# Altium PCB BuySellDisplay4Rev.PcbDoc (part 2 of 2)
Units mil, origin at the board's own origin, x right, y up, seen from the top; angles counter-clockwise.
Board outline 16511.81 x 6377.95 mil, 2 copper layers (Top Layer, Bottom Layer); 219 components, 209 nets, 584 pads, 70 vias.
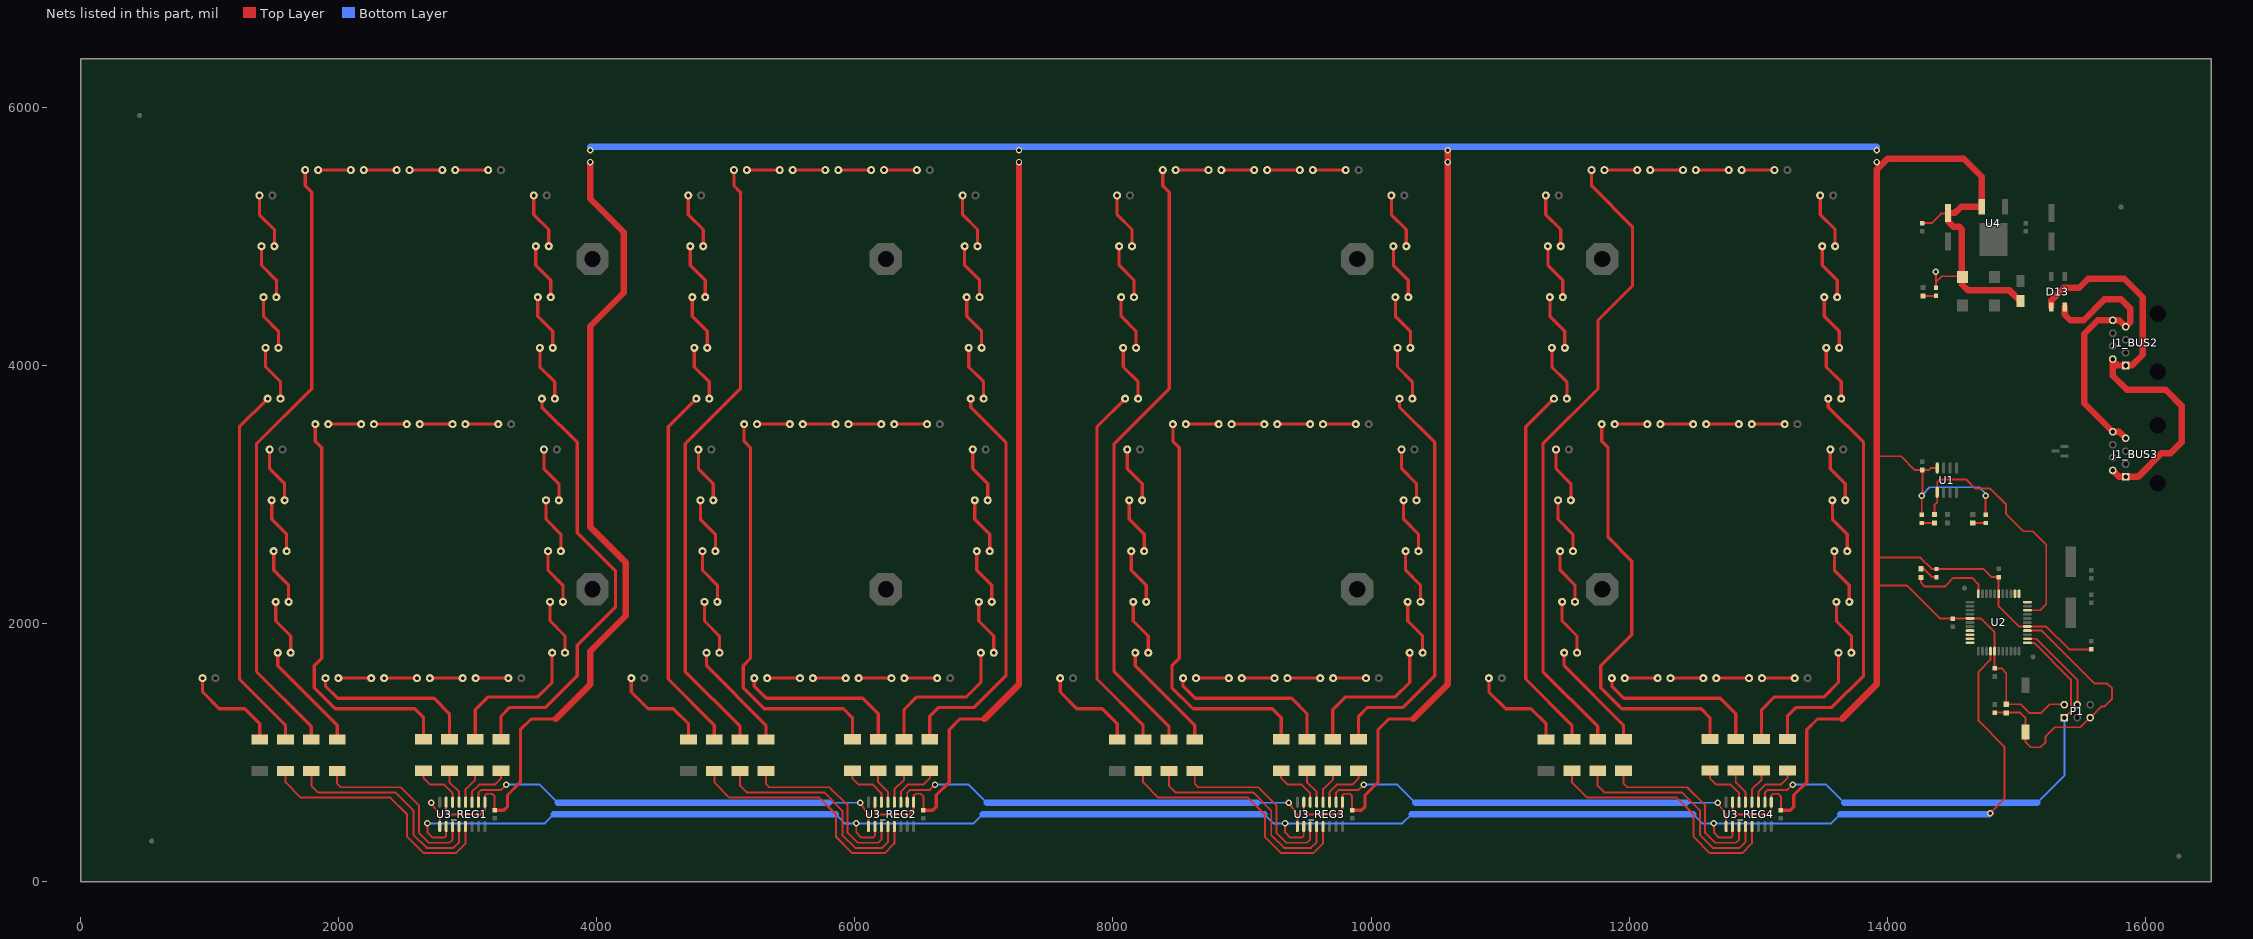
[diagram p2: the nets of this part, all layers, seen from the top]

## Via types
v1: diameter 50, hole 28, Top Layer to Bottom Layer, 68 vias
v2: diameter 50, hole 27.99, Top Layer to Bottom Layer, 2 vias

## Nets (pads, with @x,y where several pads share a name; then routed paths per layer and width w, separated by ;. In a path a pad name is that pad's centre, name@x,y a point inside that pad or via, vN(x,y) a via of type N, cw(c..) or ccw(c..) an arc to the next point about the centre after c; other vN are vias at no path point) (continued)
IND: R5.1 U2.22 | length 620.8
  Top Layer w15: R5.1@14262.45,2357.54 14262.45,2316 14292.45,2286 14445.45,2286 14513.45,2354 14657.45,2354 14706.07,2305.38 U2.22@14706.07,2230.49
INPUT: P1.1 U2.1 U3_REG4.2 | length 3785.5
  Top Layer w15: U3_REG4.2@13051.45,615.49 13051.45,689.43 13073.02,711 13226.45,711 v1(13266.45,751) ; U2.1@15085.99,1850.57 15137.88,1850.57 15422.45,1566 15422.45,1321 P1.1@15372.45,1271
  Bottom Layer w15: v1(13266.45,751) 13526.45,751 13666.45,611 ; 15162.45,611 15372.45,821 P1.1@15372.45,1271
  Bottom Layer w50: 13666.45,611 15162.45,611
MISO: P1.4 U2.2 | length 715.4
  Top Layer w15: U2.2@15085.99,1882.06 15156.38,1882.06 15474.02,1564.43 P1.4@15474.02,1368.64
NetD2_1: D2.1 R2.1 | length 98
  Top Layer w15: D2.1@14269.42,2777.54 R2.1@14367.45,2777.54
NetD3_1: D3.1 R3.1 | length 98
  Top Layer w15: R3.1@14662.45,2777.54 D3.1@14760.48,2777.54
NetD4_1: D4.1 R5.2 | length 146.9
  Top Layer w15: R5.2@14262.45,2424.46 14283.98,2424.46 14348.94,2359.5 D4.1@14382.45,2359.5
NetD6_7SEG1_K: D6_7SEG1.K R6_7SEG1.1 | length 775.5
  Top Layer w25: D6_7SEG1.K@945.46,1576.91 945.46,1469.1 1074.56,1340 1271.32,1340 1388.44,1222.88 R6_7SEG1.1@1388.44,1100.16
NetD6_7SEG2_K: D6_7SEG2.K R6_7SEG2.1 | length 775.5
  Top Layer w25: D6_7SEG2.K@4268.17,1576.91 4268.17,1469.1 4397.26,1340 4594.03,1340 4711.15,1222.88 R6_7SEG2.1@4711.15,1100.16
NetD6_7SEG3_K: D6_7SEG3.K R6_7SEG3.1 | length 775.5
  Top Layer w25: D6_7SEG3.K@7590.88,1576.91 7590.88,1469.1 7719.97,1340 7916.74,1340 8033.86,1222.88 R6_7SEG3.1@8033.86,1100.16
NetD6_7SEG4_K: D6_7SEG4.K R6_7SEG4.1 | length 775.5
  Top Layer w25: D6_7SEG4.K@10913.58,1576.91 10913.58,1469.1 11042.68,1340 11239.45,1340 11356.56,1222.88 R6_7SEG4.1@11356.56,1100.16
NetD7_L1_K: D7_L1.K D8_L1.A | length 254.4
  Top Layer w25: D8_L1.A@3061.21,1576.91 D7_L1.K@3315.6,1576.91
NetD7_L2_K: D7_L2.K D8_L2.A | length 441.6
  Top Layer w25: D7_L2.K@3591,3348.56 3591,3200.32 3706.75,3084.58 D8_L2.A@3706.75,2954.86
NetD7_L3_K: D7_L3.K D8_L3.A | length 441.6
  Top Layer w25: D7_L3.K@1465.15,3348.56 1465.15,3200.32 1580.89,3084.58 D8_L3.A@1580.89,2954.86
NetD7_L4_K: D7_L4.K D8_L4.A | length 254.4
  Top Layer w25: D8_L4.A@2982.41,3545.41 D7_L4.K@3236.86,3545.41
NetD7_L5_K: D7_L5.K D8_L5.A | length 441.6
  Top Layer w25: D7_L5.K@1386.41,5317.06 1386.41,5168.83 1502.15,5053.08 D8_L5.A@1502.15,4923.36
NetD7_L6_K: D7_L6.K D8_L6.A | length 441.6
  Top Layer w25: D7_L6.K@3512.26,5317.06 3512.26,5168.83 3628.01,5053.08 D8_L6.A@3628.01,4923.36
NetD7_L7_K: D7_L7.K D8_L7.A | length 254.4
  Top Layer w25: D8_L7.A@2903.73,5513.91 D7_L7.K@3158.12,5513.91
NetD7_L8_K: D7_L8.K D8_L8.A | length 254.4
  Top Layer w25: D8_L8.A@6383.92,1576.91 D7_L8.K@6638.31,1576.91
NetD7_L9_K: D7_L9.K D8_L9.A | length 441.6
  Top Layer w25: D7_L9.K@6913.71,3348.56 6913.71,3200.32 7029.46,3084.58 D8_L9.A@7029.46,2954.86
NetD7_L10_K: D7_L10.K D8_L10.A | length 441.6
  Top Layer w25: D7_L10.K@4787.85,3348.56 4787.85,3200.32 4903.6,3084.58 D8_L10.A@4903.6,2954.86
NetD7_L11_K: D7_L11.K D8_L11.A | length 254.4
  Top Layer w25: D8_L11.A@6305.11,3545.41 D7_L11.K@6559.57,3545.41
NetD7_L12_K: D7_L12.K D8_L12.A | length 441.6
  Top Layer w25: D7_L12.K@4709.11,5317.06 4709.11,5168.83 4824.86,5053.08 D8_L12.A@4824.86,4923.36
NetD7_L13_K: D7_L13.K D8_L13.A | length 441.6
  Top Layer w25: D7_L13.K@6834.97,5317.06 6834.97,5168.83 6950.72,5053.08 D8_L13.A@6950.72,4923.36
NetD7_L14_K: D7_L14.K D8_L14.A | length 254.4
  Top Layer w25: D8_L14.A@6226.44,5513.91 D7_L14.K@6480.83,5513.91
NetD7_L15_K: D7_L15.K D8_L15.A | length 254.4
  Top Layer w25: D8_L15.A@9706.62,1576.91 D7_L15.K@9961.02,1576.91
NetD7_L16_K: D7_L16.K D8_L16.A | length 441.6
  Top Layer w25: D7_L16.K@10236.42,3348.56 10236.42,3200.32 10352.16,3084.58 D8_L16.A@10352.16,2954.86
NetD7_L17_K: D7_L17.K D8_L17.A | length 441.6
  Top Layer w25: D7_L17.K@8110.56,3348.56 8110.56,3200.32 8226.31,3084.58 D8_L17.A@8226.31,2954.86
NetD7_L18_K: D7_L18.K D8_L18.A | length 254.4
  Top Layer w25: D8_L18.A@9627.82,3545.41 D7_L18.K@9882.28,3545.41
NetD7_L19_K: D7_L19.K D8_L19.A | length 441.6
  Top Layer w25: D7_L19.K@8031.82,5317.06 8031.82,5168.83 8147.57,5053.08 D8_L19.A@8147.57,4923.36
NetD7_L20_K: D7_L20.K D8_L20.A | length 441.6
  Top Layer w25: D7_L20.K@10157.68,5317.06 10157.68,5168.83 10273.42,5053.08 D8_L20.A@10273.42,4923.36
NetD7_L21_K: D7_L21.K D8_L21.A | length 254.4
  Top Layer w25: D8_L21.A@9549.14,5513.91 D7_L21.K@9803.54,5513.91
NetD7_L22_K: D7_L22.K D8_L22.A | length 254.4
  Top Layer w25: D8_L22.A@13029.33,1576.91 D7_L22.K@13283.73,1576.91
NetD7_L23_K: D7_L23.K D8_L23.A | length 441.6
  Top Layer w25: D7_L23.K@13559.12,3348.56 13559.12,3200.32 13674.87,3084.58 D8_L23.A@13674.87,2954.86
NetD7_L24_K: D7_L24.K D8_L24.A | length 441.6
  Top Layer w25: D7_L24.K@11433.27,3348.56 11433.27,3200.32 11549.02,3084.58 D8_L24.A@11549.08,2954.86
NetD7_L25_K: D7_L25.K D8_L25.A | length 254.4
  Top Layer w25: D8_L25.A@12950.59,3545.41 D7_L25.K@13204.99,3545.41
NetD7_L26_K: D7_L26.K D8_L26.A | length 441.6
  Top Layer w25: D7_L26.K@11354.53,5317.06 11354.53,5168.83 11470.28,5053.08 D8_L26.A@11470.28,4923.36
NetD7_L27_K: D7_L27.K D8_L27.A | length 441.6
  Top Layer w25: D7_L27.K@13480.38,5317.06 13480.38,5168.83 13596.13,5053.08 D8_L27.A@13596.13,4923.36
NetD7_L28_K: D7_L28.K D8_L28.A | length 254.4
  Top Layer w25: D8_L28.A@12871.85,5513.91 D7_L28.K@13126.25,5513.91
NetD8_L1_K: D8_L1.K D9_L1.A | length 254.4
  Top Layer w25: D9_L1.A@2706.81,1576.91 D8_L1.K@2961.21,1576.91
NetD8_L2_K: D8_L2.K D9_L2.A | length 441.6
  Top Layer w25: D8_L2.K@3606.75,2954.86 3606.75,2806.62 3722.5,2690.88 D9_L2.A@3722.43,2561.16
NetD8_L3_K: D8_L3.K D9_L3.A | length 441.6
  Top Layer w25: D8_L3.K@1480.89,2954.86 1480.89,2806.62 1596.64,2690.88 D9_L3.A@1596.64,2561.16
NetD8_L4_K: D8_L4.K D9_L4.A | length 254.4
  Top Layer w25: D9_L4.A@2628.07,3545.41 D8_L4.K@2882.41,3545.41
NetD8_L5_K: D8_L5.K D9_L5.A | length 441.6
  Top Layer w25: D8_L5.K@1402.15,4923.36 1402.15,4775.13 1517.9,4659.38 D9_L5.A@1517.9,4529.66
NetD8_L6_K: D8_L6.K D9_L6.A | length 441.6
  Top Layer w25: D8_L6.K@3528.01,4923.36 3528.01,4775.13 3643.76,4659.38 D9_L6.A@3643.76,4529.66
NetD8_L7_K: D8_L7.K D9_L7.A | length 254.4
  Top Layer w25: D9_L7.A@2549.33,5513.91 D8_L7.K@2803.73,5513.91
NetD8_L8_K: D8_L8.K D9_L8.A | length 254.4
  Top Layer w25: D9_L8.A@6029.52,1576.91 D8_L8.K@6283.92,1576.91
NetD8_L9_K: D8_L9.K D9_L9.A | length 441.6
  Top Layer w25: D8_L9.K@6929.46,2954.86 6929.46,2806.62 7045.2,2690.88 D9_L9.A@7045.2,2561.16
NetD8_L10_K: D8_L10.K D9_L10.A | length 441.6
  Top Layer w25: D8_L10.K@4803.6,2954.86 4803.6,2806.62 4919.35,2690.88 D9_L10.A@4919.35,2561.16
NetD8_L11_K: D8_L11.K D9_L11.A | length 254.4
  Top Layer w25: D9_L11.A@5950.78,3545.41 D8_L11.K@6205.11,3545.41
NetD8_L12_K: D8_L12.K D9_L12.A | length 441.6
  Top Layer w25: D8_L12.K@4724.86,4923.36 4724.86,4775.13 4840.61,4659.38 D9_L12.A@4840.61,4529.66
NetD8_L13_K: D8_L13.K D9_L13.A | length 441.6
  Top Layer w25: D8_L13.K@6850.72,4923.36 6850.72,4775.13 6966.46,4659.38 D9_L13.A@6966.4,4529.66
NetD8_L14_K: D8_L14.K D9_L14.A | length 254.4
  Top Layer w25: D9_L14.A@5872.04,5513.91 D8_L14.K@6126.44,5513.91
NetD8_L15_K: D8_L15.K D9_L15.A | length 254.4
  Top Layer w25: D9_L15.A@9352.29,1576.91 D8_L15.K@9606.62,1576.91
NetD8_L16_K: D8_L16.K D9_L16.A | length 441.6
  Top Layer w25: D8_L16.K@10252.16,2954.86 10252.16,2806.62 10367.91,2690.88 D9_L16.A@10367.91,2561.16
NetD8_L17_K: D8_L17.K D9_L17.A | length 441.6
  Top Layer w25: D8_L17.K@8126.31,2954.86 8126.31,2806.62 8242.06,2690.88 D9_L17.A@8242.06,2561.16
NetD8_L18_K: D8_L18.K D9_L18.A | length 254.4
  Top Layer w25: D9_L18.A@9273.49,3545.41 D8_L18.K@9527.82,3545.41
NetD8_L19_K: D8_L19.K D9_L19.A | length 441.6
  Top Layer w25: D8_L19.K@8047.57,4923.36 8047.57,4775.13 8163.32,4659.38 D9_L19.A@8163.32,4529.66
NetD8_L20_K: D8_L20.K D9_L20.A | length 441.6
  Top Layer w25: D8_L20.K@10173.42,4923.36 10173.42,4775.13 10289.17,4659.38 D9_L20.A@10289.11,4529.66
NetD8_L21_K: D8_L21.K D9_L21.A | length 254.4
  Top Layer w25: D9_L21.A@9194.75,5513.91 D8_L21.K@9449.14,5513.91
NetD8_L22_K: D8_L22.K D9_L22.A | length 254.4
  Top Layer w25: D9_L22.A@12674.94,1576.91 D8_L22.K@12929.33,1576.91
NetD8_L23_K: D8_L23.K D9_L23.A | length 441.6
  Top Layer w25: D8_L23.K@13574.87,2954.86 13574.87,2806.62 13690.62,2690.88 D9_L23.A@13690.62,2561.16
NetD8_L24_K: D8_L24.K D9_L24.A | length 441.6
  Top Layer w25: D8_L24.K@11449.08,2954.86 11449.02,2806.62 11564.77,2690.88 D9_L24.A@11564.77,2561.16
NetD8_L25_K: D8_L25.K D9_L25.A | length 254.4
  Top Layer w25: D9_L25.A@12596.26,3545.41 D8_L25.K@12850.59,3545.41
NetD8_L26_K: D8_L26.K D9_L26.A | length 441.6
  Top Layer w25: D8_L26.K@11370.28,4923.36 11370.28,4775.13 11486.03,4659.38 D9_L26.A@11486.03,4529.66
NetD8_L27_K: D8_L27.K D9_L27.A | length 441.6
  Top Layer w25: D8_L27.K@13496.13,4923.36 13496.13,4775.13 13611.88,4659.38 D9_L27.A@13611.82,4529.66
NetD8_L28_K: D8_L28.K D9_L28.A | length 254.4
  Top Layer w25: D9_L28.A@12517.46,5513.91 D8_L28.K@12771.85,5513.91
NetD9_L1_K: D9_L1.K D10_L1.A | length 254.4
  Top Layer w25: D10_L1.A@2352.55,1576.91 D9_L1.K@2606.94,1576.91
NetD9_L2_K: D9_L2.K D10_L2.A | length 441.6
  Top Layer w25: D9_L2.K@3622.43,2561.16 3622.43,2412.92 3738.18,2297.18 D10_L2.A@3738.18,2167.46
NetD9_L3_K: D9_L3.K D10_L3.A | length 441.6
  Top Layer w25: D9_L3.K@1496.58,2561.16 1496.58,2412.92 1612.33,2297.18 D10_L3.A@1612.39,2167.46
NetD9_L4_K: D9_L4.K D10_L4.A | length 254.4
  Top Layer w25: D10_L4.A@2273.81,3545.41 D9_L4.K@2528.2,3545.41
NetD9_L5_K: D9_L5.K D10_L5.A | length 441.6
  Top Layer w25: D9_L5.K@1417.84,4529.66 1417.84,4381.43 1533.59,4265.68 D10_L5.A@1533.59,4135.96
NetD9_L6_K: D9_L6.K D10_L6.A | length 441.6
  Top Layer w25: D9_L6.K@3543.69,4529.66 3543.69,4381.43 3659.44,4265.68 D10_L6.A@3659.44,4135.96
NetD9_L7_K: D9_L7.K D10_L7.A | length 254.4
  Top Layer w25: D10_L7.A@2195,5513.91 D9_L7.K@2449.46,5513.91
NetD9_L8_K: D9_L8.K D10_L8.A | length 254.4
  Top Layer w25: D10_L8.A@5675.25,1576.91 D9_L8.K@5929.65,1576.91
NetD9_L9_K: D9_L9.K D10_L9.A | length 441.6
  Top Layer w25: D9_L9.K@6945.14,2561.16 6945.14,2412.92 7060.89,2297.18 D10_L9.A@7060.89,2167.46
NetD9_L10_K: D9_L10.K D10_L10.A | length 441.6
  Top Layer w25: D9_L10.K@4819.29,2561.16 4819.29,2412.92 4935.04,2297.18 D10_L10.A@4935.1,2167.46
NetD9_L11_K: D9_L11.K D10_L11.A | length 254.4
  Top Layer w25: D10_L11.A@5596.51,3545.41 D9_L11.K@5850.91,3545.41
NetD9_L12_K: D9_L12.K D10_L12.A | length 441.6
  Top Layer w25: D9_L12.K@4740.55,4529.66 4740.55,4381.43 4856.3,4265.68 D10_L12.A@4856.3,4135.96
NetD9_L13_K: D9_L13.K D10_L13.A | length 441.6
  Top Layer w25: D9_L13.K@6866.4,4529.66 6866.4,4381.43 6982.15,4265.68 D10_L13.A@6982.15,4135.96
NetD9_L14_K: D9_L14.K D10_L14.A | length 254.4
  Top Layer w25: D10_L14.A@5517.71,5513.91 D9_L14.K@5772.17,5513.91
NetD9_L15_K: D9_L15.K D10_L15.A | length 254.4
  Top Layer w25: D10_L15.A@8997.96,1576.91 D9_L15.K@9252.36,1576.91
NetD9_L16_K: D9_L16.K D10_L16.A | length 441.6
  Top Layer w25: D9_L16.K@10267.85,2561.16 10267.85,2412.92 10383.6,2297.18 D10_L16.A@10383.66,2167.46
NetD9_L17_K: D9_L17.K D10_L17.A | length 441.6
  Top Layer w25: D9_L17.K@8142,2561.16 8142,2412.92 8257.74,2297.18 D10_L17.A@8257.74,2167.46
NetD9_L18_K: D9_L18.K D10_L18.A | length 254.4
  Top Layer w25: D10_L18.A@8919.22,3545.41 D9_L18.K@9173.62,3545.41
NetD9_L19_K: D9_L19.K D10_L19.A | length 441.6
  Top Layer w25: D9_L19.K@8063.26,4529.66 8063.26,4381.43 8179,4265.68 D10_L19.A@8179.07,4135.96
NetD9_L20_K: D9_L20.K D10_L20.A | length 441.6
  Top Layer w25: D9_L20.K@10189.11,4529.66 10189.11,4381.43 10304.86,4265.68 D10_L20.A@10304.86,4135.96
NetD9_L21_K: D9_L21.K D10_L21.A | length 254.4
  Top Layer w25: D10_L21.A@8840.42,5513.91 D9_L21.K@9094.88,5513.91
NetD9_L22_K: D9_L22.K D10_L22.A | length 254.4
  Top Layer w25: D10_L22.A@12320.67,1576.91 D9_L22.K@12575,1576.91
NetD9_L23_K: D9_L23.K D10_L23.A | length 441.6
  Top Layer w25: D9_L23.K@13590.56,2561.16 13590.56,2412.92 13706.31,2297.18 D10_L23.A@13706.37,2167.46
NetD9_L24_K: D9_L24.K D10_L24.A | length 441.6
  Top Layer w25: D9_L24.K@11464.77,2561.16 11464.7,2412.92 11580.45,2297.18 D10_L24.A@11580.45,2167.46
NetD9_L25_K: D9_L25.K D10_L25.A | length 254.4
  Top Layer w25: D10_L25.A@12241.93,3545.41 D9_L25.K@12496.32,3545.41
NetD9_L26_K: D9_L26.K D10_L26.A | length 441.6
  Top Layer w25: D9_L26.K@11385.96,4529.66 11385.96,4381.43 11501.71,4265.68 D10_L26.A@11501.71,4135.96
NetD9_L27_K: D9_L27.K D10_L27.A | length 441.6
  Top Layer w25: D9_L27.K@13511.82,4529.66 13511.82,4381.43 13627.57,4265.68 D10_L27.A@13627.57,4135.96
NetD9_L28_K: D9_L28.K D10_L28.A | length 254.4
  Top Layer w25: D10_L28.A@12163.19,5513.91 D9_L28.K@12417.58,5513.91
NetD10_L1_K: D10_L1.K D11_L1.A | length 254.4
  Top Layer w25: D11_L1.A@1998.15,1576.91 D10_L1.K@2252.55,1576.91
NetD10_L2_K: D10_L2.K D11_L2.A | length 441.6
  Top Layer w25: D10_L2.K@3638.24,2167.46 3638.24,2019.22 3753.99,1903.47 D11_L2.A@3753.99,1773.76
NetD10_L3_K: D10_L3.K D11_L3.A | length 441.6
  Top Layer w25: D10_L3.K@1512.39,2167.46 1512.39,2019.22 1628.14,1903.47 D11_L3.A@1628.14,1773.76
NetD10_L4_K: D10_L4.K D11_L4.A | length 254.4
  Top Layer w25: D11_L4.A@1919.41,3545.41 D10_L4.K@2173.81,3545.41
NetD10_L5_K: D10_L5.K D11_L5.A | length 441.6
  Top Layer w25: D10_L5.K@1433.65,4135.96 1433.65,3987.73 1549.4,3871.98 D11_L5.A@1549.4,3742.26
NetD10_L6_K: D10_L6.K D11_L6.A | length 441.6
  Top Layer w25: D10_L6.K@3559.5,4135.96 3559.5,3987.73 3675.25,3871.98 D11_L6.A@3675.25,3742.26
NetD10_L7_K: D10_L7.K D11_L7.A | length 254.4
  Top Layer w25: D11_L7.A@1840.67,5513.91 D10_L7.K@2095,5513.91
NetD10_L8_K: D10_L8.K D11_L8.A | length 254.4
  Top Layer w25: D11_L8.A@5320.86,1576.91 D10_L8.K@5575.25,1576.91
NetD10_L9_K: D10_L9.K D11_L9.A | length 441.6
  Top Layer w25: D10_L9.K@6960.95,2167.46 6960.95,2019.22 7076.7,1903.47 D11_L9.A@7076.7,1773.76
NetD10_L10_K: D10_L10.K D11_L10.A | length 441.6
  Top Layer w25: D10_L10.K@4835.1,2167.46 4835.1,2019.22 4950.85,1903.47 D11_L10.A@4950.85,1773.76
NetD10_L11_K: D10_L11.K D11_L11.A | length 254.4
  Top Layer w25: D11_L11.A@5242.12,3545.41 D10_L11.K@5496.51,3545.41
NetD10_L12_K: D10_L12.K D11_L12.A | length 441.6
  Top Layer w25: D10_L12.K@4756.36,4135.96 4756.36,3987.73 4872.11,3871.98 D11_L12.A@4872.11,3742.26
NetD10_L13_K: D10_L13.K D11_L13.A | length 441.6
  Top Layer w25: D10_L13.K@6882.21,4135.96 6882.21,3987.73 6997.96,3871.98 D11_L13.A@6997.96,3742.26
NetD10_L14_K: D10_L14.K D11_L14.A | length 254.4
  Top Layer w25: D11_L14.A@5163.38,5513.91 D10_L14.K@5417.71,5513.91
NetD10_L15_K: D10_L15.K D11_L15.A | length 254.4
  Top Layer w25: D11_L15.A@8643.57,1576.91 D10_L15.K@8897.96,1576.91
NetD10_L16_K: D10_L16.K D11_L16.A | length 441.6
  Top Layer w25: D10_L16.K@10283.66,2167.46 10283.66,2019.22 10399.41,1903.47 D11_L16.A@10399.41,1773.76
NetD10_L17_K: D10_L17.K D11_L17.A | length 441.6
  Top Layer w25: D10_L17.K@8157.81,2167.46 8157.81,2019.22 8273.55,1903.47 D11_L17.A@8273.55,1773.76
NetD10_L18_K: D10_L18.K D11_L18.A | length 254.4
  Top Layer w25: D11_L18.A@8564.83,3545.41 D10_L18.K@8819.22,3545.41
NetD10_L19_K: D10_L19.K D11_L19.A | length 441.6
  Top Layer w25: D10_L19.K@8079.07,4135.96 8079.07,3987.73 8194.81,3871.98 D11_L19.A@8194.81,3742.26
NetD10_L20_K: D10_L20.K D11_L20.A | length 441.6
  Top Layer w25: D10_L20.K@10204.92,4135.96 10204.92,3987.73 10320.67,3871.98 D11_L20.A@10320.61,3742.26
NetD10_L21_K: D10_L21.K D11_L21.A | length 254.4
  Top Layer w25: D11_L21.A@8486.09,5513.91 D10_L21.K@8740.42,5513.91
NetD10_L22_K: D10_L22.K D11_L22.A | length 254.4
  Top Layer w25: D11_L22.A@11966.28,1576.91 D10_L22.K@12220.67,1576.91
NetD10_L23_K: D10_L23.K D11_L23.A | length 441.6
  Top Layer w25: D10_L23.K@13606.37,2167.46 13606.37,2019.22 13722.12,1903.47 D11_L23.A@13722.12,1773.76
NetD10_L24_K: D10_L24.K D11_L24.A | length 441.6
  Top Layer w25: D10_L24.K@11480.51,2167.46 11480.51,2019.22 11596.26,1903.47 D11_L24.A@11596.26,1773.76
NetD10_L25_K: D10_L25.K D11_L25.A | length 254.4
  Top Layer w25: D11_L25.A@11887.54,3545.41 D10_L25.K@12141.93,3545.41
NetD10_L26_K: D10_L26.K D11_L26.A | length 441.6
  Top Layer w25: D10_L26.K@11401.77,4135.96 11401.77,3987.73 11517.52,3871.98 D11_L26.A@11517.52,3742.26
NetD10_L27_K: D10_L27.K D11_L27.A | length 441.6
  Top Layer w25: D10_L27.K@13527.63,4135.96 13527.63,3987.73 13643.38,3871.98 D11_L27.A@13643.31,3742.26
NetD10_L28_K: D10_L28.K D11_L28.A | length 254.4
  Top Layer w25: D11_L28.A@11808.8,5513.91 D10_L28.K@12063.19,5513.91
NetD11_L1_K: D11_L1.K R7_L1.1 | length 1309.4
  Top Layer w25: D11_L1.K@1898.15,1576.91 1898.15,1513.69 1991.85,1420 2739.32,1420 2858.32,1301 R7_L1.1@2858.32,1103.05
NetD11_L2_K: D11_L2.K R7_L2.1 | length 1142.4
  Top Layer w25: R7_L2.1@3058.32,1103.05 3058.32,1331 3158.32,1431 3542.32,1431 3653.99,1542.67 D11_L2.K@3653.99,1773.76
NetD11_L3_K: D11_L3.K R7_L3.1 | length 861.3
  Top Layer w25: D11_L3.K@1528.14,1773.76 1528.14,1673.19 1988.44,1212.88 R7_L3.1@1988.44,1103.12
NetD11_L4_K: D11_L4.K R7_L4.1 | length 3197
  Top Layer w25: D11_L4.K@1819.41,3545.41 1819.41,3412.43 1868.85,3363 1868.85,1731 1811.85,1674 1811.85,1503 1974.85,1340 2589.32,1340 2658.32,1271 R7_L4.1@2658.32,1103.05
NetD11_L5_K: D11_L5.K R7_L5.1 | length 2877.4
  Top Layer w25: D11_L5.K@1449.4,3742.26 1231.32,3524.19 1231.32,1570 1588.44,1212.88 R7_L5.1@1588.44,1103.12
NetD11_L6_K: D11_L6.K R7_L6.1 | length 3404.7
  Top Layer w25: R7_L6.1@3258.32,1103.05 3258.32,1281 3327.32,1350 3603.32,1350 3848.32,1595 3848.32,1832.58 4145.67,2129.92 4145.67,2405.51 3848.32,2702.86 3848.32,3403 3575.19,3676.13 D11_L6.K@3575.19,3742.26
NetD11_L7_K: D11_L7.K R7_L7.1 | length 4784.6
  Top Layer w25: D11_L7.K@1740.67,5513.91 1740.67,5391.17 1790.85,5341 1790.85,3819.52 1363.56,3392.23 1363.56,1627.77 1788.44,1202.88 R7_L7.1@1788.44,1103.12
NetD11_L8_K: D11_L8.K R7_L8.1 | length 1309.4
  Top Layer w25: D11_L8.K@5220.86,1576.91 5220.86,1513.69 5314.55,1420 6062.03,1420 6181.03,1301 R7_L8.1@6181.03,1103.05
NetD11_L9_K: D11_L9.K R7_L9.1 | length 1142.4
  Top Layer w25: R7_L9.1@6381.03,1103.05 6381.03,1331 6481.03,1431 6865.03,1431 6976.7,1542.67 D11_L9.K@6976.7,1773.76
NetD11_L10_K: D11_L10.K R7_L10.1 | length 861.3
  Top Layer w25: D11_L10.K@4850.85,1773.76 4850.85,1673.19 5311.15,1212.88 R7_L10.1@5311.15,1103.12
NetD11_L11_K: D11_L11.K R7_L11.1 | length 3197
  Top Layer w25: D11_L11.K@5142.12,3545.41 5142.12,3412.43 5191.55,3363 5191.55,1731 5134.55,1674 5134.55,1503 5297.55,1340 5912.03,1340 5981.03,1271 R7_L11.1@5981.03,1103.05
NetD11_L12_K: D11_L12.K R7_L12.1 | length 2877.4
  Top Layer w25: D11_L12.K@4772.11,3742.26 4554.03,3524.19 4554.03,1570 4911.15,1212.88 R7_L12.1@4911.15,1103.12
NetD11_L13_K: D11_L13.K R7_L13.1 | length 3158.4
  Top Layer w25: R7_L13.1@6581.03,1103.05 6581.03,1281 6650.03,1350 6926.03,1350 7171.03,1595 7171.03,3403 6897.9,3676.13 D11_L13.K@6897.9,3742.26
NetD11_L14_K: D11_L14.K R7_L14.1 | length 4784.6
  Top Layer w25: D11_L14.K@5063.38,5513.91 5063.38,5391.17 5113.55,5341 5113.55,3819.52 4686.26,3392.23 4686.26,1627.77 5111.15,1202.88 R7_L14.1@5111.15,1103.12
NetD11_L15_K: D11_L15.K R7_L15.1 | length 1309.4
  Top Layer w25: D11_L15.K@8543.57,1576.91 8543.57,1513.69 8637.26,1420 9384.74,1420 9503.74,1301 R7_L15.1@9503.74,1103.05
NetD11_L16_K: D11_L16.K R7_L16.1 | length 1142.4
  Top Layer w25: R7_L16.1@9703.74,1103.05 9703.74,1331 9803.74,1431 10187.74,1431 10299.41,1542.67 D11_L16.K@10299.41,1773.76
NetD11_L17_K: D11_L17.K R7_L17.1 | length 861.3
  Top Layer w25: D11_L17.K@8173.55,1773.76 8173.55,1673.19 8633.86,1212.88 R7_L17.1@8633.86,1103.12
NetD11_L18_K: D11_L18.K R7_L18.1 | length 3197
  Top Layer w25: D11_L18.K@8464.83,3545.41 8464.83,3412.43 8514.26,3363 8514.26,1731 8457.26,1674 8457.26,1503 8620.26,1340 9234.74,1340 9303.74,1271 R7_L18.1@9303.74,1103.05
NetD11_L19_K: D11_L19.K R7_L19.1 | length 2877.4
  Top Layer w25: D11_L19.K@8094.81,3742.26 7876.74,3524.19 7876.74,1570 8233.86,1212.88 R7_L19.1@8233.86,1103.12
NetD11_L20_K: D11_L20.K R7_L20.1 | length 3158.4
  Top Layer w25: R7_L20.1@9903.74,1103.05 9903.74,1281 9972.74,1350 10248.74,1350 10493.74,1595 10493.74,3403 10220.61,3676.13 D11_L20.K@10220.61,3742.26
NetD11_L21_K: D11_L21.K R7_L21.1 | length 4784.6
  Top Layer w25: D11_L21.K@8386.09,5513.91 8386.09,5391.17 8436.26,5341 8436.26,3819.52 8008.97,3392.23 8008.97,1627.77 8433.86,1202.88 R7_L21.1@8433.86,1103.12
NetD11_L22_K: D11_L22.K R7_L22.1 | length 1309.4
  Top Layer w25: D11_L22.K@11866.28,1576.91 11866.28,1513.69 11959.97,1420 12707.45,1420 12826.45,1301 R7_L22.1@12826.45,1103.05
NetD11_L23_K: D11_L23.K R7_L23.1 | length 1142.4
  Top Layer w25: R7_L23.1@13026.45,1103.05 13026.45,1331 13126.45,1431 13510.45,1431 13622.12,1542.67 D11_L23.K@13622.12,1773.76
NetD11_L24_K: D11_L24.K R7_L24.1 | length 861.3
  Top Layer w25: D11_L24.K@11496.26,1773.76 11496.26,1673.19 11956.56,1212.88 R7_L24.1@11956.56,1103.12
NetD11_L25_K: D11_L25.K R7_L25.1 | length 3349
  Top Layer w25: D11_L25.K@11787.54,3545.41 11787.54,3412.43 11836.97,3363 11836.97,2667.36 12020.47,2483.86 12020.47,1914.5 11779.97,1674 11779.97,1503 11942.97,1340 12557.45,1340 12626.45,1271 R7_L25.1@12626.45,1103.05
NetD11_L26_K: D11_L26.K R7_L26.1 | length 2877.4
  Top Layer w25: D11_L26.K@11417.52,3742.26 11199.45,3524.19 11199.45,1570 11556.56,1212.88 R7_L26.1@11556.56,1103.12
NetD11_L27_K: D11_L27.K R7_L27.1 | length 3158.4
  Top Layer w25: R7_L27.1@13226.45,1103.05 13226.45,1281 13295.45,1350 13571.45,1350 13816.45,1595 13816.45,3403 13543.31,3676.13 D11_L27.K@13543.31,3742.26
NetD11_L28_K: D11_L28.K R7_L28.1 | length 5005.4
  Top Layer w25: D11_L28.K@11708.8,5513.91 11708.8,5391.17 12025.59,5074.38 12025.59,4615.35 11758.97,4348.73 11758.97,3819.52 11331.68,3392.23 11331.68,1627.77 11756.56,1202.88 R7_L28.1@11756.56,1103.12
NetD14_1: D14.1 R8.1 | length 98
  Top Layer w15: R8.1@14279.42,4539.5 D14.1@14377.45,4539.5
NetU3_REG1_2: U3_REG1.2 U3_REG2.9 | length 3309.7
  Top Layer w15: U3_REG1.2@3083.32,615.49 3083.32,689.43 3104.89,711 3258.32,711 v1(3298.32,751) ; v1(6041.03,611) 6106.03,516 U3_REG2.9@6106.03,426.51
  Bottom Layer w15: v1(3298.32,751) 3558.32,751 3698.32,611 ; 5807.03,611 v1(6041.03,611)
  Bottom Layer w50: 3698.32,611 5797.03,611
NetU3_REG2_2: U3_REG2.2 U3_REG3.9 | length 3309.7
  Top Layer w15: U3_REG2.2@6406.03,615.49 6406.03,689.43 6427.6,711 6581.03,711 v1(6621.03,751) ; v1(9363.74,611) 9428.74,516 U3_REG3.9@9428.74,426.51
  Bottom Layer w15: v1(6621.03,751) 6881.03,751 7021.03,611 ; 9129.74,611 v1(9363.74,611)
  Bottom Layer w50: 7021.03,611 9119.74,611
NetU3_REG3_2: U3_REG3.2 U3_REG4.9 | length 3309.7
  Top Layer w15: U3_REG3.2@9728.74,615.49 9728.74,689.43 9750.31,711 9903.74,711 v1(9943.74,751) ; v1(12686.45,611) 12751.45,516 U3_REG4.9@12751.45,426.51
  Bottom Layer w15: v1(9943.74,751) 10203.74,751 10343.74,611 ; 12452.45,611 v1(12686.45,611)
  Bottom Layer w50: 10343.74,611 12442.45,611
OUTPUT: U3_REG1.9 | length 204.6
  Top Layer w15: v1(2718.32,611) 2783.32,516 U3_REG1.9@2783.32,426.51
PIN_A: U2.30
PIN_B: U2.31
PIN_C: U2.32
PIN_D: U2.33
POWER_V+: D13.1 J1_BUS2.1 J1_BUS2.2 J1_BUS3.1 J1_BUS3.2 | length 3324.8
  Top Layer w50: D13.1@15269.89,4452.89 15269.89,4503.44 15367.45,4601 15487.45,4601 15557.45,4671 15837.45,4671 15980,4528.45 15980,4083.55 15895.83,3999.39 15784.06,3999.39 J1_BUS2.2@15747.49,4035.96 ; J1_BUS3.2@15747.45,3186 15797.45,3136 15942.45,3136 16127.45,3321 16197.45,3321 16282.45,3406 16282.45,3686 16157.45,3811 15857.45,3811 15747.49,3920.96 J1_BUS2.2@15747.49,4049.39
POWER_V-: D13.2 J1_BUS2.7 J1_BUS2.8 J1_BUS3.7 J1_BUS3.8 | length 2192.5
  Top Layer w50: D13.2@15375.01,4452.89 15375.01,4393.44 15417.45,4351 15522.45,4351 15682.45,4511 15812.45,4511 15882.45,4441 15882.45,4334.35 J1_BUS2.7@15847.49,4299.39 15797.49,4349.39 15630.83,4349.39 15527.45,4246 15527.45,3706.04 J1_BUS3.8@15747.45,3486 15797.45,3486 J1_BUS3.7@15844.95,3438.5 ; J1_BUS2.8@15747.49,4349.39 J1_BUS2.8@15750.87,4346
RCK: U2.37 U3_REG1.10 U3_REG2.10 U3_REG3.10 U3_REG4.10 | length 14970.4
  Top Layer w15: v1(2688.32,451) 2688.32,381 2728.32,341 2818.32,341 2833.32,356 U3_REG1.10@2833.32,426.51 ; v1(6011.03,451) 6011.03,381 6051.03,341 6141.03,341 6156.03,356 U3_REG2.10@6156.03,426.51 ; v1(9333.74,451) 9333.74,381 9373.74,341 9463.74,341 9478.74,356 U3_REG3.10@9478.74,426.51 ; v1(12656.45,451) 12656.45,381 12696.45,341 12786.45,341 12801.45,356 U3_REG4.10@12801.45,426.51 ; v1(14797.45,531) 14907.45,641 14907.45,1046 14707.45,1246 14707.45,1626 14800.16,1718.71 U2.37@14800.16,1785.21
  Bottom Layer w15: v1(2688.32,451) 3598.32,451 3668.32,521 ; 5851.03,521 5921.03,451 6921.03,451 6991.03,521 ; 9173.74,521 9243.74,451 10243.74,451 10313.74,521 ; 12496.45,521 12566.45,451 13566.45,451 13636.45,521
  Bottom Layer w50: 3668.32,521 5851.03,521 ; 6991.03,521 9173.74,521 ; 10313.74,521 12496.45,521 ; 13636.45,521 14787.45,521 v1(14797.45,531)
RO: R2.2 U1.1 U2.9 | length 1992.7
  Top Layer w15: R2.2@14367.45,2844.46 14367.45,2921 14387.45,2941 14387.45,3096 14407.45,3116 14612.45,3116 14682.45,3046 14797.45,3046 14921.2,2922.25 14921.2,2847.25 15053.7,2714.75 15128.7,2714.75 15232.45,2611 15232.45,2151 15183.98,2102.54 U2.9@15085.99,2102.54
RST: C2.1 P1.5 R4.1 S1.1 U2.4 | length 2240.6
  Top Layer w15: C2.1@14832.45,1309.5 15028.95,1309.5 15072.45,1266 S1.1@15072.45,1160.29 ; S1.1@15072.45,1166 15072.45,1081 15112.45,1041 15187.45,1041 15227.45,1081 15227.45,1126 15297.45,1196 15497.45,1196 15657.45,1356 15682.45,1356 15742.45,1416 15742.45,1498 15706.45,1534 15609.45,1534 15198.39,1945.06 U2.4@15085.99,1945.06
SEGA_7SEG1: R7_L7.2 U3_REG1.12 | length 1708.4
  Top Layer w15: R7_L7.2@1788.44,856.07 1788.44,741.24 1838.68,691 2440.32,691 2581.32,550 2581.32,361.12 2681.45,261 2888.32,261 2933.32,306 U3_REG1.12@2933.32,426.51
SEGA_7SEG2: R7_L14.2 U3_REG2.12 | length 1708.4
  Top Layer w15: R7_L14.2@5111.15,856.07 5111.15,741.24 5161.39,691 5763.03,691 5904.03,550 5904.03,361.12 6004.16,261 6211.03,261 6256.03,306 U3_REG2.12@6256.03,426.51
SEGA_7SEG3: R7_L21.2 U3_REG3.12 | length 1708.4
  Top Layer w15: R7_L21.2@8433.86,856.07 8433.86,741.24 8484.1,691 9085.74,691 9226.74,550 9226.74,361.12 9326.87,261 9533.74,261 9578.74,306 U3_REG3.12@9578.74,426.51
SEGA_7SEG4: R7_L28.2 U3_REG4.12 | length 1708.4
  Top Layer w15: R7_L28.2@11756.56,856.07 11756.56,741.24 11806.81,691 12408.45,691 12549.45,550 12549.45,361.12 12649.57,261 12856.45,261 12901.45,306 U3_REG4.12@12901.45,426.51
SEGB_7SEG1: R7_L5.2 U3_REG1.13 | length 1971.8
  Top Layer w15: R7_L5.2@1588.44,856.07 1588.44,768.12 1705.56,651 2400.32,651 2531.32,520 2531.32,348 2658.32,221 2908.32,221 2983.32,296 U3_REG1.13@2983.32,426.51
SEGB_7SEG2: R7_L12.2 U3_REG2.13 | length 1971.8
  Top Layer w15: R7_L12.2@4911.15,856.07 4911.15,768.12 5028.26,651 5723.03,651 5854.03,520 5854.03,348 5981.03,221 6231.03,221 6306.03,296 U3_REG2.13@6306.03,426.51
SEGB_7SEG3: R7_L19.2 U3_REG3.13 | length 1971.8
  Top Layer w15: R7_L19.2@8233.86,856.07 8233.86,768.12 8350.97,651 9045.74,651 9176.74,520 9176.74,348 9303.74,221 9553.74,221 9628.74,296 U3_REG3.13@9628.74,426.51
SEGB_7SEG4: R7_L26.2 U3_REG4.13 | length 1971.8
  Top Layer w15: R7_L26.2@11556.56,856.07 11556.56,768.12 11673.68,651 12368.45,651 12499.45,520 12499.45,348 12626.45,221 12876.45,221 12951.45,296 U3_REG4.13@12951.45,426.51
SEGC_7SEG1: R7_L6.2 U3_REG1.3 | length 407
  Top Layer w15: U3_REG1.3@3033.32,615.49 3033.32,696 3088.32,751 3208.32,751 3258.32,801 R7_L6.2@3258.32,858.95
SEGC_7SEG2: R7_L13.2 U3_REG2.3 | length 407
  Top Layer w15: U3_REG2.3@6356.03,615.49 6356.03,696 6411.03,751 6531.03,751 6581.03,801 R7_L13.2@6581.03,858.95
SEGC_7SEG3: R7_L20.2 U3_REG3.3 | length 407
  Top Layer w15: U3_REG3.3@9678.74,615.49 9678.74,696 9733.74,751 9853.74,751 9903.74,801 R7_L20.2@9903.74,858.95
SEGC_7SEG4: R7_L27.2 U3_REG4.3 | length 407
  Top Layer w15: U3_REG4.3@13001.45,615.49 13001.45,696 13056.45,751 13176.45,751 13226.45,801 R7_L27.2@13226.45,858.95
SEGD_7SEG1: R7_L4.2 U3_REG1.6 | length 401.1
  Top Layer w15: R7_L4.2@2658.32,858.95 2658.32,801 2708.32,751 2818.32,751 2883.32,686 U3_REG1.6@2883.32,615.49
SEGD_7SEG2: R7_L11.2 U3_REG2.6 | length 401.1
  Top Layer w15: R7_L11.2@5981.03,858.95 5981.03,801 6031.03,751 6141.03,751 6206.03,686 U3_REG2.6@6206.03,615.49
SEGD_7SEG3: R7_L18.2 U3_REG3.6 | length 401.1
  Top Layer w15: R7_L18.2@9303.74,858.95 9303.74,801 9353.74,751 9463.74,751 9528.74,686 U3_REG3.6@9528.74,615.49
SEGD_7SEG4: R7_L25.2 U3_REG4.6 | length 401.1
  Top Layer w15: R7_L25.2@12626.45,858.95 12626.45,801 12676.45,751 12786.45,751 12851.45,686 U3_REG4.6@12851.45,615.49
SEGE_7SEG1: R7_L3.2 U3_REG1.11 | length 1417.2
  Top Layer w15: R7_L3.2@1988.44,856.07 1988.44,758.12 2015.56,731 2480.32,731 2621.32,590 2621.32,378 2698.32,301 2858.32,301 2883.32,326 U3_REG1.11@2883.32,426.51
SEGE_7SEG2: R7_L10.2 U3_REG2.11 | length 1417.2
  Top Layer w15: R7_L10.2@5311.15,856.07 5311.15,758.12 5338.26,731 5803.03,731 5944.03,590 5944.03,378 6021.03,301 6181.03,301 6206.03,326 U3_REG2.11@6206.03,426.51
SEGE_7SEG3: R7_L17.2 U3_REG3.11 | length 1417.2
  Top Layer w15: R7_L17.2@8633.86,856.07 8633.86,758.12 8660.97,731 9125.74,731 9266.74,590 9266.74,378 9343.74,301 9503.74,301 9528.74,326 U3_REG3.11@9528.74,426.51
SEGE_7SEG4: R7_L24.2 U3_REG4.11 | length 1417.2
  Top Layer w15: R7_L24.2@11956.56,856.07 11956.56,758.12 11983.68,731 12448.45,731 12589.45,590 12589.45,378 12666.45,301 12826.45,301 12851.45,326 U3_REG4.11@12851.45,426.51
SEGF_7SEG1: R7_L2.2 U3_REG1.4 | length 274.5
  Top Layer w15: U3_REG1.4@2983.32,615.49 2983.32,716 3058.32,791 R7_L2.2@3058.32,858.95
SEGF_7SEG2: R7_L9.2 U3_REG2.4 | length 274.5
  Top Layer w15: U3_REG2.4@6306.03,615.49 6306.03,716 6381.03,791 R7_L9.2@6381.03,858.95
SEGF_7SEG3: R7_L16.2 U3_REG3.4 | length 274.5
  Top Layer w15: U3_REG3.4@9628.74,615.49 9628.74,716 9703.74,791 R7_L16.2@9703.74,858.95
SEGF_7SEG4: R7_L23.2 U3_REG4.4 | length 274.5
  Top Layer w15: U3_REG4.4@12951.45,615.49 12951.45,716 13026.45,791 R7_L23.2@13026.45,858.95
SEGG_7SEG1: R7_L1.2 U3_REG1.5 | length 274.5
  Top Layer w15: R7_L1.2@2858.32,858.95 2858.32,771 2933.32,696 U3_REG1.5@2933.32,615.49
SEGG_7SEG2: R7_L8.2 U3_REG2.5 | length 274.5
  Top Layer w15: R7_L8.2@6181.03,858.95 6181.03,771 6256.03,696 U3_REG2.5@6256.03,615.49
SEGG_7SEG3: R7_L15.2 U3_REG3.5 | length 274.5
  Top Layer w15: R7_L15.2@9503.74,858.96 9503.74,771 9578.74,696 U3_REG3.5@9578.74,615.49
SEGG_7SEG4: R7_L22.2 U3_REG4.5 | length 274.5
  Top Layer w15: R7_L22.2@12826.45,858.95 12826.45,771 12901.45,696 U3_REG4.5@12901.45,615.49
TCP_RESET: U2.13
USART1_RX: U2.11
USART1_TX: U2.12
VCC: C1.1 C4.1 C5.1 C6.1 C7.1 C9_REG1.1 C9_REG2.1 C9_REG3.1 C9_REG4.1 C11.1 C13.1 D2.2 D3.2 D4.2 D12.2 D14.2 D16.1 P1.2 R4.2 U1.8 U2.5 U2.17 U2.27 U2.38 U3_REG1.1 U3_REG1.7 U3_REG2.1 U3_REG2.7 U3_REG3.1 U3_REG3.7 U3_REG4.1 U3_REG4.7 U4.3 | length 44206.1
  Top Layer w15: U3_REG1.7@2833.32,615.49 2833.32,546 2858.32,521 3098.32,521 3133.32,556 3133.32,666 3148.32,681 3188.32,681 3208.32,661 C9_REG1.1@3208.32,552.5 ; U3_REG2.7@6156.03,615.49 6156.03,546 6181.03,521 6421.03,521 6456.03,556 6456.03,666 6471.03,681 6511.03,681 6531.03,661 C9_REG2.1@6531.03,552.5 ; U3_REG3.7@9478.74,615.49 9478.74,546 9503.74,521 9743.74,521 9778.74,556 9778.74,666 9793.74,681 9833.74,681 9853.74,661 C9_REG3.1@9853.74,552.5 ; U3_REG4.7@12801.45,615.49 12801.45,546 12826.45,521 13066.45,521 13101.45,556 13101.45,666 13116.45,681 13156.45,681 13176.45,661 C9_REG4.1@13176.45,552.5 ; 13917.45,2511 14257.45,2511 14345.95,2422.5 14744.95,2422.5 14806.45,2361 14863.55,2361 U2.17@14863.55,2230.49 ; 13917.45,3296 14107.45,3296 14213.94,3189.51 14321.47,3189.51 14337.45,3205.49 U1.8@14387.45,3205.49 ; 13922.45,2296 14152.45,2296 14410.32,2038.13 C4.1@14509.38,2038.13 ; D2.2@14267.45,2842.5 v1(14267.45,2991) ; v1@14272.45,2996 C1.1@14272.45,3189.51 ; C13.1@14272.45,5102.5 14343.94,5102.5 14417.45,5176 C11.1@14472.45,5176 ; D14.2@14377.45,4596 14377.45,4646 14422.45,4691 D16.1@14582.45,4691 ; D14.2@14377.45,4602.5 v1(14377.45,4726) ; C4.1@14509.38,2039.54 14723.9,2039.54 14832.45,1931 U2.38@14832.45,1785.61 ; D3.2@14762.45,2842.5 v1(14762.45,2991) ; C5.1@14832.05,1652.5 U2.38@14832.05,1785.61 ; C5.1@14832.45,1652.5 14885.95,1652.5 14922.45,1616 R4.2@14922.45,1374.46 15034.95,1374.46 15103.41,1306 15191.49,1306 15259.95,1374.46 P1.2@15372.45,1374.46 ; U2.17@14863,2236 14863,2135.45 15022.45,1976 U2.5@15092.45,1976 ; U2.5@15085.99,1976.55 15231.9,1976.55 15408.94,1799.5 C6.1@15582.45,1799.5
  Top Layer w25: C9_REG1.1@3208.32,552.5 3279.82,552.5 3308.32,581 3308.32,671 3408.32,771 3408.32,1177 3491.32,1260 3681.32,1260 ; C9_REG2.1@6531.03,552.5 6602.53,552.5 6631.03,581 6631.03,671 6731.03,771 6731.03,1177 6814.03,1260 7004.03,1260 ; C9_REG3.1@9853.74,552.5 9925.24,552.5 9953.74,581 9953.74,671 10053.74,771 10053.74,1177 10136.74,1260 10326.74,1260 ; C9_REG4.1@13176.45,552.5 13247.94,552.5 13276.45,581 13276.45,671 13376.45,771 13376.45,1177 13459.45,1260 13649.45,1260
  Top Layer w50: 3681.32,1260 3949.32,1528 3949.32,1783.97 4224.41,2059.06 4224.41,2472.44 3949.32,2747.53 3949.32,4303.66 4208.66,4562.99 4208.66,5031.5 3949.32,5290.83 v1(3949.32,5576) ; 7004.03,1260 7272.03,1528 v1(7272.03,5576) ; 10326.74,1260 10594.74,1528 v1(10594.74,5666) ; 13649.45,1260 13917.45,1528 13917.45,5516 14002.45,5601 14592.45,5601 14732.45,5461 U4.3@14732.45,5241 ; D16.1@14577.45,4686 14577.45,5056 14557.45,5076 14512.45,5076 14472.45,5116 C11.1@14472.45,5181 14523.55,5181 14573,5230.45 U4.3@14732.29,5230.45 ; D16.1@14582.45,4681 14582.45,4626 14627.45,4581 14947.45,4581 D12.2@15027.45,4501
  Bottom Layer w15: v1(14267.45,2991) 14327.45,3056 14712.45,3056 14762.45,3006 v1(14762.45,2991)
  Bottom Layer w50: 3949.32,5696 13917.45,5696
  other v1: 13917.45,5576 3949.32,5666 7272.03,5666 13917.45,5666
  other v2: 10594.72,5575.98
pads on no net: J1_BUS2.3 J1_BUS2.5 J1_BUS2.MH1 J1_BUS2.MH2 J1_BUS3.3 J1_BUS3.5 J1_BUS3.MH1 J1_BUS3.MH2 U2.15 U2.16 U2.19 U2.20 U2.21 U2.23 U2.24 U2.25 U2.26 U2.29 U2.34 U2.35 U2.36 U2.40 U2.41 U2.42 U2.43 U2.44

## Polygon pours and split planes (outlines as drawn)
EXTSUPP on Top Layer "Top Layer-No Net" (solid, pour order 1015): 14910.45,5671 14908.45,5671 14806.45,5773 15014.45,5773
VCC on Top Layer "Top Layer-No Net" (solid, pour order 1002): 13847.45,5721 13987.45,5721 13987.45,5551 13947.45,5511 13887.45,5511 13847.45,5551
VCC on Top Layer "Top Layer-No Net" (solid, pour order 1015): 13994.45,2296 13994.45,2294 13892.45,2192 13892.45,2400
VCC on Top Layer "Top Layer-No Net" (solid, pour order 1015): 13994.45,2511 13994.45,2509 13892.45,2407 13892.45,2615
VCC on Top Layer "Top Layer-No Net" (solid, pour order 1015): 13997.45,3296 13997.45,3294 13895.45,3192 13895.45,3400
A on Top Layer "Top Layer-No Net" (solid, pour order 1001): 15282.45,3206 15375.05,3298.6 15655.05,3298.6 15657.45,3301 15562.45,3206
B on Top Layer "Top Layer-No Net" (solid, pour order 1000): 15375.05,3373.4 15665.05,3373.4 15560.05,3478.4 15270.05,3478.4
EXTSUPP on Top Layer "Top Layer-No Net" (solid, pour order 1014): 13499.45,5513.91 13605.45,5619.91 13605.45,5407.91
EXTSUPP on Top Layer "Top Layer-No Net" (solid, pour order 1015): 13580.38,5670 13578.38,5670 13476.38,5772 13684.38,5772
EXTSUPP on Top Layer "Top Layer-No Net" (solid, pour order 1010): 13236.64,3827 13130.64,3721 13236.64,3721
EXTSUPP on Top Layer "Top Layer-No Net" (solid, pour order 1013): 13226.97,5407 13332.97,5513 13226.97,5513
EXTSUPP on Top Layer "Top Layer-No Net" (solid, pour order 1010): 13392.97,3539.9 13286.97,3645.9 13286.97,3539.9
EXTSUPP on Top Layer "Top Layer-No Net" (solid, pour order 1009): 13286.97,3457 13392.97,3563 13286.97,3563
EXTSUPP on Top Layer "Top Layer-No Net" (solid, pour order 1011): 11003.68,5667 10897.68,5773 11109.68,5773
EXTSUPP on Top Layer "Top Layer-No Net" (solid, pour order 1015): 11454.53,5670 11452.53,5670 11350.53,5772 11558.53,5772
EXTSUPP on Top Layer "Top Layer-No Net" (solid, pour order 1015): 8131.82,5670 8129.82,5670 8027.82,5772 8235.82,5772
EXTSUPP on Top Layer "Top Layer-No Net" (solid, pour order 1011): 7680.97,5667 7574.97,5773 7786.97,5773
EXTSUPP on Top Layer "Top Layer-No Net" (solid, pour order 1009): 9964.26,3457 10070.26,3563 9964.26,3563
EXTSUPP on Top Layer "Top Layer-No Net" (solid, pour order 1010): 10070.26,3539.9 9964.26,3645.9 9964.26,3539.9
EXTSUPP on Top Layer "Top Layer-No Net" (solid, pour order 1013): 9904.26,5407 10010.26,5513 9904.26,5513
EXTSUPP on Top Layer "Top Layer-No Net" (solid, pour order 1010): 9913.93,3827 9807.93,3721 9913.93,3721
EXTSUPP on Top Layer "Top Layer-No Net" (solid, pour order 1015): 10257.68,5670 10255.68,5670 10153.68,5772 10361.68,5772
EXTSUPP on Top Layer "Top Layer-No Net" (solid, pour order 1014): 10176.74,5513.91 10282.74,5619.91 10282.74,5407.91
VCC on Top Layer "Top Layer-No Net" (solid, pour order 1002): 10524.74,5721 10664.74,5721 10664.74,5551 10624.74,5511 10564.74,5511 10524.74,5551
EXTSUPP on Top Layer "Top Layer-No Net" (solid, pour order 1014): 6854.03,5513.91 6960.03,5619.91 6960.03,5407.91
EXTSUPP on Top Layer "Top Layer-No Net" (solid, pour order 1015): 6934.97,5670 6932.97,5670 6830.97,5772 7038.97,5772
EXTSUPP on Top Layer "Top Layer-No Net" (solid, pour order 1010): 6591.22,3827 6485.22,3721 6591.22,3721
EXTSUPP on Top Layer "Top Layer-No Net" (solid, pour order 1013): 6581.55,5407 6687.55,5513 6581.55,5513
no net on Top Layer "Top Layer-No Net" (solid, pour order 1010): 6747.55,3539.9 6641.55,3645.9 6641.55,3539.9
no net on Top Layer "Top Layer-No Net" (solid, pour order 1009): 6641.55,3457 6747.55,3563 6641.55,3563
EXTSUPP on Top Layer "Top Layer-No Net" (solid, pour order 1011): 4358.26,5667 4252.26,5773 4464.26,5773
EXTSUPP on Top Layer "Top Layer-No Net" (solid, pour order 1015): 4809.11,5670 4807.11,5670 4705.11,5772 4913.11,5772
EXTSUPP on Top Layer "Top Layer-No Net" (solid, pour order 1014): 3531.32,5513.91 3637.32,5619.91 3637.32,5407.91
EXTSUPP on Top Layer "Top Layer-No Net" (solid, pour order 1015): 3612.26,5670 3610.26,5670 3508.26,5772 3716.26,5772
EXTSUPP on Top Layer "Top Layer-No Net" (solid, pour order 1010): 3268.51,3827 3162.51,3721 3268.51,3721
EXTSUPP on Top Layer "Top Layer-No Net" (solid, pour order 1013): 3258.85,5407 3364.85,5513 3258.85,5513
no net on Top Layer "Top Layer-No Net" (solid, pour order 1010): 3424.85,3539.9 3318.85,3645.9 3318.85,3539.9
no net on Top Layer "Top Layer-No Net" (solid, pour order 1009): 3318.85,3457 3424.85,3563 3318.85,3563
EXTSUPP on Top Layer "Top Layer-No Net" (solid, pour order 1015): 1486.41,5670 1484.41,5670 1382.41,5772 1590.41,5772
VCC on Top Layer "Top Layer-No Net" (solid, pour order 1002): 3879.32,5721 4019.32,5721 4019.32,5551 3979.32,5511 3919.32,5511 3879.32,5551
VCC on Top Layer "Top Layer-No Net" (solid, pour order 1002): 7202.03,5721 7342.03,5721 7342.03,5551 7302.03,5511 7242.03,5511 7202.03,5551
EXTSUPP on Top Layer "Top Layer-No Net" (solid, pour order 1014): 3437.85,3550.3 3331.85,3444.3 3331.85,3656.3
EXTSUPP on Top Layer "Top Layer-No Net" (solid, pour order 1014): 6760.55,3550.3 6654.55,3444.3 6654.55,3656.3
EXTSUPP on Top Layer "Top Layer-No Net" (solid, pour order 1014): 10083.26,3550.3 9977.26,3444.3 9977.26,3656.3
EXTSUPP on Top Layer "Top Layer-No Net" (solid, pour order 1014): 13405.84,3550.3 13299.84,3444.3 13299.84,3656.3
GND on Top Layer "Top Layer-No Net" (solid, pour order 1000): 0,1 0,1020 13579.45,1020 13889.45,1330 13889.45,6378.67 cw(c13891.33,6378.67) 13890,6380 16507.06,6380 cw(c16507.06,6373.01) 16512,6377.95 16512,0
VCC on Bottom Layer "Top Layer-No Net" (solid, pour order 1015): 13850.45,5616 13848.45,5616 13746.45,5718 13954.45,5718
VCC on Bottom Layer "Top Layer-No Net" (solid, pour order 1008): 13847.45,5721 13987.45,5721 13987.45,5551 13947.45,5511 13887.45,5511 13847.45,5551
VCC on Bottom Layer "Top Layer-No Net" (solid, pour order 1008): 10524.74,5721 10664.74,5721 10664.74,5551 10624.74,5511 10564.74,5511 10524.74,5551
VCC on Bottom Layer "Top Layer-No Net" (solid, pour order 1015): 7205.03,5616 7203.03,5616 7101.03,5718 7309.03,5718
VCC on Bottom Layer "Top Layer-No Net" (solid, pour order 1008): 7202.03,5721 7342.03,5721 7342.03,5551 7302.03,5511 7242.03,5511 7202.03,5551
VCC on Bottom Layer "Top Layer-No Net" (solid, pour order 1008): 3879.32,5721 4019.32,5721 4019.32,5551 3979.32,5511 3919.32,5511 3879.32,5551
VCC on Bottom Layer "Top Layer-No Net" (solid, pour order 1015): 10527.74,5616 10525.74,5616 10423.74,5718 10631.74,5718
VCC on Bottom Layer "Top Layer-No Net" (solid, pour order 1015): 10662.74,5616 10660.74,5616 10558.74,5718 10766.74,5718
VCC on Bottom Layer "Top Layer-No Net" (solid, pour order 1015): 7340.03,5616 7338.03,5616 7236.03,5718 7444.03,5718
VCC on Bottom Layer "Top Layer-No Net" (solid, pour order 1015): 4017.32,5616 4015.32,5616 3913.32,5718 4121.32,5718
GND on Bottom Layer "Top Layer-No Net" (solid, pour order 1001): 0,0 0,6377.95 16511.89,6377.95 ccw(c16511.89,6378.11) 16512,6378 16512,3

## Keep-outs
Keep-Out Layer:
  lines w10: 0,1 16512.45,1 16512.45,6377.95 0,6377.95 0,1

## Silkscreen, mask and mechanical layers (free items; w line width, h text height)
Top Overlay:
  lines w10: 14127.45,2211 14192.45,2211 ; 14127.45,2606 14192.45,2606 ; 14147.45,2181 14147.45,2246 ; 14147.45,2276 14147.45,2341 ; 14147.45,2371 14147.45,2436 ; 14147.45,2461 14147.45,2526 ; 14147.45,2556 14147.45,2621 ; 14157.45,4846 14222.45,4846 ; 14162.45,4376 14227.45,4376 ; 14182.45,4346 14182.45,4411 ; 14182.45,4441 14182.45,4506 ; 14182.45,4536 14182.45,4601 ; 14182.45,4626 14182.45,4691 ; 14182.45,4721 14182.45,4786 ; 14182.45,4811 14182.45,4876 ; 14215.48,2667.97 14215.48,2942.97 14417.77,2942.97 14417.77,2667.97 ; 14217.45,2211 14282.45,2211 ; 14217.45,2606 14282.45,2606 ; 14242.45,4846 14307.45,4846 ; 14252.45,4376 14317.45,4376 ; 14312.45,2211 14377.45,2211 ; 14312.45,2606 14377.45,2606 ; 14337.45,4846 14402.45,4846 ; 14347.45,4376 14412.45,4376 ; 14407.45,2211 14472.45,2211 ; 14407.45,2606 14472.45,2606 ; 14432.45,4846 14497.45,4846 ; 14437.45,2181 14437.45,2246 ; 14437.45,2276 14437.45,2341 ; 14437.45,2371 14437.45,2436 ; 14437.45,2461 14437.45,2526 ; 14437.45,2556 14437.45,2621 ; 14442.45,4376 14507.45,4376 ; 14472.45,4346 14472.45,4411 ; 14472.45,4441 14472.45,4506 ; 14472.45,4536 14472.45,4601 ; 14472.45,4626 14472.45,4691 ; 14472.45,4721 14472.45,4786 ; 14472.45,4811 14472.45,4876 ; 14613.77,2667.97 14613.77,2942.97 14805.48,2942.97 14805.48,2667.97 ; 15322.45,1211 15322.45,1046 15622.45,1046 15622.45,1211 ; 15322.45,1436 15322.45,1601 15622.45,1601 15622.45,1436 ; 15422.45,1046 15422.45,1211 ; 15427.45,1436 15427.45,1601 ; 15517.45,1046 15517.45,1211 ; 15522.45,1436 15522.45,1601
  text "GND" at 14212.45,4771 h60
  text "+5.0V" at 14327.45,4771 h60
  text "485 DI" at 14636.77,2684.92 h60
  text "485 RO" at 14230.48,2682.97 h60
  text "Keep Alive" at 14182.45,2536 h60 r270
  text "VTG" at 15387.45,1471.48 h60 r90
  text "GND" at 15584.45,1467.97 h60 r90
  text "MOSI" at 15485.95,1452 h60 r90
  text "MISO" at 15387.45,1083 h60 r90
  text "SCK" at 15485.95,1083 h60 r90
  text "RST" at 15584.45,1083 h60 r90
  text "ISP6PIN" at 15335.45,994 h60
  text "BANCO AZTECA" at 14564.93,851.03 h120
  text "BOARD:" at 14564.93,746.03 h120
  text "BAZ-NUMDISPLAY-01R03" at 14965.93,742.03 h120
Mechanical 1:
  drawing of 288 lines, arcs and shapes, not listed
Mechanical 13:
  drawing of 307 lines, arcs and shapes, not listed

## Dimensions
16512.45,6377.95 to 0,6720.47 on Mechanical 13
14090.55,7834.65 to 13992.13,9114.17 on Mechanical 13
1869.41,3545.41 to 1770.99,4824.94 on Mechanical 13
3236.74,3545.41 to 3335.16,2265.88 on Mechanical 13
10299.41,1773.76 to 9960.89,1576.91 on Mechanical 13
6976.7,1773.76 to 6638.18,1576.91 on Mechanical 13
3653.99,1773.76 to 3315.48,1576.91 on Mechanical 13
14155.19,1773.76 to 13722.12,1773.76 on Mechanical 13
21669.29,-787.4 to 6984.25,-1574.8 on Mechanical 13
21669.29,-787.4 to 16885.83,-787.4 on Mechanical 13
21669.29,-1437.01 to 17692.91,-1417.32 on Mechanical 13
10960.63,-1633.86 to 6984.25,-1614.17 on Mechanical 13
13722.12,1773.76 to 945.46,1576.91 on Mechanical 13
13722.12,1773.76 to 7334.65,-1062.99 on Mechanical 13
21669.29,-3159.61 to 14326.77,-3385.83 on Mechanical 13
14677.17,-1082.99 to 7334.65,-1309.21 on Mechanical 13
14685.04,-1106.61 to 0,-1894.02 on Mechanical 13
14677.17,7251.97 to 18625.98,7185.04 on Mechanical 13
12417.32,8267.72 to 1393.7,8070.87 on Mechanical 13
6905.51,9055.12 to 1393.7,8661.42 on Mechanical 13
6905.51,9055.12 to 9681.1,9448.82 on Mechanical 13
4268.17,1576.91 to 13722.12,1773.76 on Mechanical 13
9133.86,7248.03 to 4385.83,7598.43 on Mechanical 13
9016.2,6145.67 to 4268.17,6496.06 on Mechanical 13
11792.13,4824.92 to 6240.17,4824.92 on Mechanical 13
16544.09,6401.57 to 16512.45,1 on Mechanical 13
17558.27,1478.74 to 16512.45,1 on Mechanical 13
17558.27,1478.74 to 13192.91,5634.25 on Mechanical 13
19328.74,5634.25 to 19179.13,6027.56 on Mechanical 13
18834.65,7874.02 to 18755.91,14251.97 on Mechanical 13
16472.44,0 to 16393.7,6377.95 on Mechanical 13

## Text inside footprints (layer, text, board x,y; h text height)
C10: Top Overlay "+" at 15127.45,5271 h98.43 r270
C11: Top Overlay "+" at 14327.45,5271 h98.43 r270
D13: Top Overlay "~" at 15282.45,4506 h60 r90; Top Overlay "~" at 15387.45,4506 h60 r90; Top Overlay "+" at 15282.45,4606 h60 r90; Top Overlay "-" at 15392.45,4611 h60 r90
P1: Top Overlay "2" at 15280.45,1368 h50; Top Overlay "1" at 15281.45,1257 h50; Top Overlay "5" at 15643.45,1259 h50; Top Overlay "6" at 15641.45,1360 h50